# EAGLE board CT_schematic (EAGLE 7.6.0)

Size 100 x 80 mm. Coordinates in mm from the lower left corner, seen from the top.
Outline: 0,0 100,0 100,80 0,80 0,0
Copper layers (1*16): Top 0.035mm / dielectric 1.5mm / Bottom 0.035mm
Design rules "default": minimum track width 10mil, minimum drill 24mil, track to track 8mil, track to pad 8mil, pad to pad 8mil, via to via 8mil, smd to smd 8mil, copper to edge 40mil, drill to drill 8mil, minimum pad ring 10mil, minimum via ring 8mil, stop-mask expansion 4mil, vias tented up to drill 0mil, thermal gap 10mil

## Footprints (pad centres in the part's own frame; a part is rotated, then mirrored left to right if it is on the bottom)
C0603 = smd 0.8 x 0.8: 1 -0.762,0; 2 0.762,0
C0402 = smd 0.5 x 0.5: 1 -0.508,0; 2 0.508,0
C0805 = smd 1.2 x 1.3: 1 -1.016,0; 2 1.016,0
EXV-9B = smd 2.718 x 1.778: 1 -2.108,0; 2 2.108,0
C1206 = smd 1.3 x 1.6: 1 -1.524,0; 2 1.524,0
C1210 = smd 1.2 x 2.5: 1 -1.524,0; 2 1.524,0
EXV-9H = smd 3.505 x 1.676: 1 -2.857,0; 2 2.857,0
L0603 = smd 0.8 x 0.8: 1 -0.762,0; 2 0.762,0
L1210 = smd 1.2 x 2.5: 1 -1.524,0; 2 1.524,0
PJ-037B_PACKAGE = drill 3.7 square: 1 12,0 | drill 3.2 square: 2 6,0
R0603 = smd 0.8 x 0.8: 1 -0.762,0; 2 0.762,0
LQFP100 = smd 0.3 x 1.2: 1 -6,-7.75; 2 -5.5,-7.75; 3 -5,-7.75; 4 -4.5,-7.75; 5 -4,-7.75; 6 -3.5,-7.75; 7 -3,-7.75; 8 -2.5,-7.75; 9 -2,-7.75; 10 -1.5,-7.75; 11 -1,-7.75; 12 -0.5,-7.75; 13 0,-7.75; 14 0.5,-7.75; 15 1,-7.75; 16 1.5,-7.75; 17 2,-7.75; 18 2.5,-7.75; 19 3,-7.75; 20 3.5,-7.75; 21 4,-7.75; 22 4.5,-7.75; 23 5,-7.75; 24 5.5,-7.75; 25 6,-7.75; 51 6,7.75; 52 5.5,7.75; 53 5,7.75; 54 4.5,7.75; 55 4,7.75; 56 3.5,7.75; 57 3,7.75; 58 2.5,7.75; 59 2,7.75; 60 1.5,7.75; 61 1,7.75; 62 0.5,7.75; 63 0,7.75; 64 -0.5,7.75; 65 -1,7.75; 66 -1.5,7.75; 67 -2,7.75; 68 -2.5,7.75; 69 -3,7.75; 70 -3.5,7.75; 71 -4,7.75; 72 -4.5,7.75; 73 -5,7.75; 74 -5.5,7.75; 75 -6,7.75 | smd 1.2 x 0.3: 26 7.75,-6; 27 7.75,-5.5; 28 7.75,-5; 29 7.75,-4.5; 30 7.75,-4; 31 7.75,-3.5; 32 7.75,-3; 33 7.75,-2.5; 34 7.75,-2; 35 7.75,-1.5; 36 7.75,-1; 37 7.75,-0.5; 38 7.75,0; 39 7.75,0.5; 40 7.75,1; 41 7.75,1.5; 42 7.75,2; 43 7.75,2.5; 44 7.75,3; 45 7.75,3.5; 46 7.75,4; 47 7.75,4.5; 48 7.75,5; 49 7.75,5.5; 50 7.75,6; 76 -7.75,6; 77 -7.75,5.5; 78 -7.75,5; 79 -7.75,4.5; 80 -7.75,4; 81 -7.75,3.5; 82 -7.75,3; 83 -7.75,2.5; 84 -7.75,2; 85 -7.75,1.5; 86 -7.75,1; 87 -7.75,0.5; 88 -7.75,0; 89 -7.75,-0.5; 90 -7.75,-1; 91 -7.75,-1.5; 92 -7.75,-2; 93 -7.75,-2.5; 94 -7.75,-3; 95 -7.75,-3.5; 96 -7.75,-4; 97 -7.75,-4.5; 98 -7.75,-5; 99 -7.75,-5.5; 100 -7.75,-6
SOT-23-6 = smd 1.1 x 0.6: 1 -1.4,0.95; 2 -1.4,0; 3 -1.4,-0.95; 4 1.4,-0.95; 5 1.4,0; 6 1.4,0.95
SSOP-20 = smd 1.651 x 0.432: 1 -3.48,2.925; 2 -3.48,2.275; 3 -3.48,1.625; 4 -3.48,0.975; 5 -3.48,0.325; 6 -3.48,-0.325; 7 -3.48,-0.975; 8 -3.48,-1.625; 9 -3.48,-2.275; 10 -3.48,-2.925; 11 3.48,-2.925; 12 3.48,-2.275; 13 3.48,-1.625; 14 3.48,-0.975; 15 3.48,-0.325; 16 3.48,0.325; 17 3.48,0.975; 18 3.48,1.625; 19 3.48,2.275; 20 3.48,2.925
182-009-MALE = drill 1.194 pad 1.524 octagon: 1 -5.537,10.923; 2 -2.769,10.923; 3 0,10.923; 4 2.769,10.923; 5 5.537,10.923; 6 -4.153,8.08; 7 -1.384,8.08; 8 1.384,8.08; 9 4.153,8.08 | hole 3.048: -12.446,9.501; 12.446,9.501
SOIC-8 = smd 1.6 x 0.6: 1 -2.7,1.905 | smd 1.55 x 0.6: 2 -2.7,0.635; 3 -2.7,-0.635; 4 -2.7,-1.905; 5 2.7,-1.905; 6 2.7,-0.635; 7 2.7,0.635; 8 2.7,1.905
TSSOP20-I = smd 0.4 x 1.35: 1 -2.925,-2.875; 2 -2.275,-2.875; 3 -1.625,-2.875; 4 -0.975,-2.875; 5 -0.325,-2.875; 6 0.325,-2.875; 7 0.975,-2.875; 8 1.625,-2.875; 9 2.275,-2.875; 10 2.925,-2.875; 11 2.925,2.875; 12 2.275,2.875; 13 1.625,2.875; 14 0.975,2.875; 15 0.325,2.875; 16 -0.325,2.875; 17 -0.975,2.875; 18 -1.625,2.875; 19 -2.275,2.875; 20 -2.925,2.875
MICRO_USB_AB = smd 0.4 x 1.35: 1 1.3,0.26; 2 0.65,0.26; 3 0,0.26; 4 -0.65,0.26; 5 -1.3,0.26 | drill 0.6 pad 0.95 long: 6 4.175,-2.54; 7 -4.175,-2.54 | drill 0.7 pad 1.1 long: 8 -2.225,0.46; 9 2.225,0.46
SOT143B = smd 1 x 0.7: 1 -0.75,-1 | smd 0.6 x 0.7: 2 0.95,-1; 3 0.95,1; 4 -0.95,1
ABS07-32.768KHZ-7-T = smd 1.1 x 2.4: 1 -2.5,0; 2 0,0
ABLS-25.000MHZ-B2F-T = smd 5.6 x 2.8: 1 -3.81,0; 2 5.69,0
LP2954 = smd 1.6 x 0.6: 1 -2.475,1.905 | smd 1.55 x 0.6: 2 -2.475,0.635; 3 -2.475,-0.635; 4 -2.475,-1.905; 5 2.475,-1.905; 6 2.475,-0.635; 7 2.475,0.635; 8 2.475,1.905
WSON-8 = smd 0.3 x 0.6: 1 -0.75,0; 2 0.05,0; 3 0.85,0; 4 1.65,0; 5 1.65,3.8; 6 0.85,3.8; 7 0.05,3.8; 8 -0.75,3.8 | smd 3 x 2.6: PAD 0.45,1.9
SON-6 = smd 0.55 x 0.3: 1 -0.355,0.5 | smd 0.52 x 0.3: 2 -0.37,0; 3 -0.37,-0.5; 4 0.37,-0.5; 5 0.37,0; 6 0.37,0.5
SW_4-1437565-2 = smd 1.4 x 2.1: 1 -2.23,4.55; 2 -2.23,-4.55; 3 2.23,4.55; 4 2.23,-4.55
LGM67K-G1J2-24-Z = smd 0.8 x 1.4: A -2,0; C 0,0
NC7SZ125M5X = smd 1.3 x 0.7: 1 -1.3,0.95; 2 -1.3,0; 3 -1.3,-0.95; 4 1.3,-0.95; 5 1.3,0.95
DUMMY_PACKAGE_173 = drill 0.3: 1 0,-1; 2 1.5,-1

## Placement (x,y rotation side)
C1  1e-06  [C0603]  -45.72,82.55 0 top  (outside the outline)
C2  1e-07  [C0603]  -49.53,82.55 0 top  (outside the outline)
C3  1e-07  [C0603]  -53.34,82.55 0 top  (outside the outline)
C4  1e-07  [C0603]  -57.15,82.55 0 top  (outside the outline)
C5  1e-07  [C0603]  -60.96,82.55 0 top  (outside the outline)
C6  1e-07  [C0603]  -64.77,82.55 0 top  (outside the outline)
C7  1e-07  [C0603]  -68.58,82.55 0 top  (outside the outline)
C8  4.7e-06  [C0603]  -34.29,82.55 0 top  (outside the outline)
C9  2.2e-06  [C0603]  -38.1,82.55 0 top  (outside the outline)
C10  2.2e-06  [C0603]  -41.91,82.55 0 top  (outside the outline)
C11  1e-08  [C0603]  -72.39,82.55 0 top  (outside the outline)
C12  1e-06  [C0603]  -76.2,82.55 0 top  (outside the outline)
C13  1e-11  [C0402]  -45.72,87.63 0 top  (outside the outline)
C14  1e-11  [C0402]  -49.53,87.63 0 top  (outside the outline)
C15  1e-11  [C0402]  -53.34,87.63 0 top  (outside the outline)
C16  1e-11  [C0402]  -57.15,87.63 0 top  (outside the outline)
C17  1e-06  [C0603]  -80.01,82.55 0 top  (outside the outline)
C18  1e-06  [C0603]  -83.82,82.55 0 top  (outside the outline)
C19  1e-06  [C0603]  -87.63,82.55 0 top  (outside the outline)
C20  4.7e-06  [C0805]  -21.59,76.2 0 top  (outside the outline)
C21  1e-06  [C0603]  -15.24,87.63 0 top  (outside the outline)
C22  1e-06  [C0603]  -19.05,87.63 0 top  (outside the outline)
C23  1e-07  [C0402]  -60.96,87.63 0 top  (outside the outline)
C24  1e-07  [C0402]  -64.77,87.63 0 top  (outside the outline)
C25  1e-07  [C0402]  -68.58,87.63 0 top  (outside the outline)
C26  1e-07  [C0402]  -72.39,87.63 0 top  (outside the outline)
C27  1e-07  [C0402]  -76.2,87.63 0 top  (outside the outline)
C28  1e-07  [C0402]  -80.01,87.63 0 top  (outside the outline)
C29  1e-06  [EXV-9B]  -68.58,68.58 0 top  (outside the outline)
C30  2.2e-06  [EXV-9B]  -77.47,68.58 0 top  (outside the outline)
C31  1e-08  [C0402]  -83.82,87.63 0 top  (outside the outline)
C32  1e-05  [C1206]  -60.96,68.58 0 top  (outside the outline)
C33  1e-05  [C1210]  -48.26,69.85 0 top  (outside the outline)
C34  1e-07  [C0402]  -87.63,87.63 0 top  (outside the outline)
C35  0.0001  [EXV-9H]  -48.26,60.96 0 top  (outside the outline)
C36  0.0001  [EXV-9H]  -59.69,60.96 0 top  (outside the outline)
C37  1e-08  [C0402]  -15.24,92.71 0 top  (outside the outline)
F1  240.0  [L0603]  -22.86,87.63 0 top  (outside the outline)
I1  1.5e-05  [L1210]  -54.61,69.85 0 top  (outside the outline)
J1  PJ-037B  [PJ-037B_PACKAGE]  -87.63,29.21 0 top  (outside the outline)
R2  1000.0  [R0603]  -26.67,87.63 0 top  (outside the outline)
R4  4700.0  [R0603]  -30.48,87.63 0 top  (outside the outline)
R5  47000.0  [R0603]  -72.39,76.2 0 top  (outside the outline)
R6  10000.0  [R0603]  -77.47,76.2 0 top  (outside the outline)
R7  10000.0  [R0603]  -82.55,76.2 0 top  (outside the outline)
R8  10000.0  [R0603]  -87.63,76.2 0 top  (outside the outline)
R9  100000.0  [R0603]  -26.67,76.2 0 top  (outside the outline)
R10  100000.0  [R0603]  -31.75,76.2 0 top  (outside the outline)
R11  100000.0  [R0603]  -36.83,76.2 0 top  (outside the outline)
R12  120.0  [R0603]  -34.29,87.63 0 top  (outside the outline)
R13  100000.0  [R0603]  -41.91,76.2 0 top  (outside the outline)
R14  100000.0  [R0603]  -46.99,76.2 0 top  (outside the outline)
R15  47000.0  [R0603]  -15.24,82.55 0 top  (outside the outline)
R16  100000.0  [R0603]  -52.07,76.2 0 top  (outside the outline)
R17  100000.0  [R0603]  -57.15,76.2 0 top  (outside the outline)
R18  3900.0  [R0603]  -38.1,87.63 0 top  (outside the outline)
R19  1000.0  [R0603]  -41.91,87.63 0 top  (outside the outline)
R20  10000.0  [R0603]  -20.32,82.55 0 top  (outside the outline)
R21  10000.0  [R0603]  -25.4,82.55 0 top  (outside the outline)
R22  82000.0  [R0603]  -30.48,82.55 0 top  (outside the outline)
R23  300000.0  [R0603]  -62.23,76.2 0 top  (outside the outline)
R24  120000.0  [R0603]  -67.31,76.2 0 top  (outside the outline)
U1  STM32f207VGT6  [LQFP100]  -63.5,31.75 0 top  (outside the outline)
U2  MAX4995AAUT+T  [SOT-23-6]  -85.09,68.58 0 top  (outside the outline)
U3  MAX3218EAP+T  [SSOP-20]  -17.78,60.96 0 top  (outside the outline)
U4  182-009-113R531  [182-009-MALE]  -36.83,6.35 0 top  (outside the outline)
U5  MCP2562-E/SN  [SOIC-8]  -86.36,49.53 0 top  (outside the outline)
U6  182-009-113R531  [182-009-MALE]  -76.2,6.35 0 top  (outside the outline)
U7  SP3203ECY-L/TR  [TSSOP20-I]  -55.88,49.53 0 top  (outside the outline)
U8  182-009-113R531  [182-009-MALE]  -36.83,27.94 0 top  (outside the outline)
U9  47590-0001  [MICRO_USB_AB]  -20.32,52.07 0 top  (outside the outline)
U10  prtr5v0u2ax  [SOT143B]  -27.94,92.71 0 top  (outside the outline)
U11  ABS07-32.768KHZ-7-T  [ABS07-32.768KHZ-7-T]  -27.94,69.85 0 top  (outside the outline)
U12  ABLS-25.000MHZ-B2F-T  [ABLS-25.000MHZ-B2F-T]  -78.74,60.96 0 top  (outside the outline)
U13  LP2954AIMX/NOPB  [LP2954]  -72.39,49.53 0 top  (outside the outline)
U14  LP3878SDX-ADJ/NOPB  [WSON-8]  -40.64,59.69 0 top  (outside the outline)
U15  TPS3895ADRYR  [SON-6]  -35.56,91.44 0 top  (outside the outline)
U16  4-1437565-2  [SW_4-1437565-2]  -40.64,49.53 0 top  (outside the outline)
U17  Q65110A2395  [LGM67K-G1J2-24-Z]  -36.83,69.85 0 top  (outside the outline)
U18  nc7sz125m5x  [NC7SZ125M5X]  -15.24,76.2 0 top  (outside the outline)
U19  Dummy  [DUMMY_PACKAGE_173]  -33.02,92.71 0 top  (outside the outline)

## Library data of the parts
C1-C37 F1 I1 J1 R2 R4-R24 U1-U19 = circuit_tree

## Nets
CLK_CRYSTAL_U1_8: C13.1 U1.8 U11.1
CLK_CRYSTAL_U1_9: C14.1 U1.9 U11.2
CLK_CRYSTAL_U1_12: C15.1 U1.12 U12.1
CLK_CRYSTAL_U1_13: C16.1 U1.13 U12.2
GND: C1.2 C2.2 C3.2 C4.2 C5.2 C6.2 C7.2 C8.2 C9.2 C10.2 C11.2 C12.2 C13.2 C14.2 C15.2 C16.2 C17.2 C18.2 C19.2 C21.2 C22.2 C23.2 C24.2 C27.2 C28.2 C29.2 C30.2 C31.2 C32.2 C33.2 C34.2 C35.2 C36.2 C37.2 J1.2 R2.2 R5.2 R6.2 R8.2 R16.2 R19.2 R22.2 R24.2 U1.10 U1.20 U1.27 U1.74 U2.2 U3.5 U3.17 U3.20 U4.5 U5.2 U5.8 U6.5 U7.18 U8.5 U9.5 U9.6 U9.7 U9.8 U9.9 U10.1 U13.4 U14.3 U14.PAD U15.2 U17.C U18.1 U18.3 U19.1
NET_U1_14: R4.1 U1.14 U18.4
NET_U1_22: C11.1 C12.1 F1.1 U1.21 U1.22
NET_U1_49: C9.1 U1.49
NET_U1_73: C10.1 U1.73
NET_U1_94: R6.1 U1.94
NET_U1_97: U17.A
NET_U1_98: U16.3 U16.4
NET_U2_3: R5.1 U2.3
NET_U3_1: I1.1 U3.1
NET_U3_2: R9.1 U3.2
NET_U3_3: R10.1 U3.3
NET_U3_4: R11.1 U3.4
NET_U3_15: C19.1 U3.15
NET_U3_16: C20.2 U3.16
NET_U3_18: C20.1 U3.18
NET_U3_19: C18.1 U3.19
NET_U4_2: U3.12 U4.2
NET_U4_3: U3.14 U4.3
NET_U4_7: U3.11 U4.7
NET_U4_8: U3.13 U4.8
NET_U5_6: R12.2 U5.6
NET_U6_2: R12.2 U5.6 U6.2
NET_U6_3: R12.1 U5.7 U6.3
NET_U7_1: C25.1 U7.1
NET_U7_2: C27.1 U7.2
NET_U7_3: C25.2 U7.3
NET_U7_4: C26.1 U7.4
NET_U7_5: C26.2 U7.5
NET_U7_6: C28.1 U7.6
NET_U7_20: U7.20
NET_U8_2: U7.14 U8.2
NET_U8_3: U7.17 U8.3
NET_U8_7: U7.13 U8.7
NET_U8_8: U7.16 U8.8
NET_U13_3: R14.1 U13.3
NET_U13_5: R13.1 U13.5
NET_U13_7: R15.2 R16.1 U13.7
NET_U14_1: C31.1 U14.1
NET_U14_6: R18.2 R19.1 U14.6
NET_U14_8: R17.1 U14.8
NET_U15_1: R21.1 R22.1 U15.1
NET_U15_3: R23.2 R24.1 U15.3
NET_U15_4: R20.1 U15.4 U18.2
NET_U16_1: R2.1 U16.1 U16.2
PROC_CAN1_RX: U1.81 U5.4
PROC_CAN1_TX: U1.82 U5.1
PROC_DAC_OUT2: U1.30 U19.2
PROC_GPIO_TO_U1_USB_FAULT: R7.1 U1.2 U2.6
PROC_GPIO_TO_U1_VBUS_EN: R8.1 U1.1 U2.4
PROC_UART4_RX: U1.24 U7.11
PROC_UART4_TX: U1.23 U7.7
PROC_UART5_RX: U1.83 U3.9
PROC_UART5_TX: U1.80 U3.7
PROC_USB_OTG_FS_DM: U1.70 U9.2 U10.3
PROC_USB_OTG_FS_DP: U1.71 U9.3 U10.2
PROC_USB_OTG_FS_ID: U1.69 U9.4
PROC_USB_OTG_FS_VBUS: U1.68 U2.1 U9.1 U10.4
VCC_S1_9V3: C29.1 C32.1 C35.1 C36.1 J1.1 R14.2 R17.2 U13.8 U14.4
VCC_TIER1_1V8: C1.1 C2.1 C3.1 C4.1 C5.1 C6.1 C7.1 C8.1 C17.1 C22.1 C24.1 C30.1 C34.1 C37.1 F1.2 I1.2 R4.2 R7.2 R9.2 R10.2 R11.2 R13.2 R15.1 R20.2 R21.2 R23.1 U1.6 U1.11 U1.19 U1.28 U1.50 U1.75 U1.100 U3.6 U5.5 U7.12 U13.1 U15.6 U18.5
VCC_TIER1_5V0: C21.1 C23.1 C33.1 R18.1 U2.5 U5.3 U7.19 U14.5

## Tracks (layer width: path | path; a pad name or v marks a point on that pad's centre or on a via)
CLK_CRYSTAL_U1_8  (2 unrouted)
CLK_CRYSTAL_U1_9  (2 unrouted)
CLK_CRYSTAL_U1_12  (2 unrouted)
CLK_CRYSTAL_U1_13  (2 unrouted)
GND  (70 unrouted)
NET_U1_14  (2 unrouted)
NET_U1_22  (4 unrouted)
NET_U1_49  (1 unrouted)
NET_U1_73  (1 unrouted)
NET_U1_94  (1 unrouted)
NET_U1_98  (1 unrouted)
NET_U2_3  (1 unrouted)
NET_U3_1  (1 unrouted)
NET_U3_2  (1 unrouted)
NET_U3_3  (1 unrouted)
NET_U3_4  (1 unrouted)
NET_U3_15  (1 unrouted)
NET_U3_16  (1 unrouted)
NET_U3_18  (1 unrouted)
NET_U3_19  (1 unrouted)
NET_U4_2  (1 unrouted)
NET_U4_3  (1 unrouted)
NET_U4_7  (1 unrouted)
NET_U4_8  (1 unrouted)
NET_U5_6  (1 unrouted)
NET_U6_2  (2 unrouted)
NET_U6_3  (2 unrouted)
NET_U7_1  (1 unrouted)
NET_U7_2  (1 unrouted)
NET_U7_3  (1 unrouted)
NET_U7_4  (1 unrouted)
NET_U7_5  (1 unrouted)
NET_U7_6  (1 unrouted)
NET_U8_2  (1 unrouted)
NET_U8_3  (1 unrouted)
NET_U8_7  (1 unrouted)
NET_U8_8  (1 unrouted)
NET_U13_3  (1 unrouted)
NET_U13_5  (1 unrouted)
NET_U13_7  (2 unrouted)
NET_U14_1  (1 unrouted)
NET_U14_6  (2 unrouted)
NET_U14_8  (1 unrouted)
NET_U15_1  (2 unrouted)
NET_U15_3  (2 unrouted)
NET_U15_4  (2 unrouted)
NET_U16_1  (2 unrouted)
PROC_CAN1_RX  (1 unrouted)
PROC_CAN1_TX  (1 unrouted)
PROC_DAC_OUT2  (1 unrouted)
PROC_GPIO_TO_U1_USB_FAULT  (2 unrouted)
PROC_GPIO_TO_U1_VBUS_EN  (2 unrouted)
PROC_UART4_RX  (1 unrouted)
PROC_UART4_TX  (1 unrouted)
PROC_UART5_RX  (1 unrouted)
PROC_UART5_TX  (1 unrouted)
PROC_USB_OTG_FS_DM  (2 unrouted)
PROC_USB_OTG_FS_DP  (2 unrouted)
PROC_USB_OTG_FS_ID  (1 unrouted)
PROC_USB_OTG_FS_VBUS  (3 unrouted)
VCC_S1_9V3  (8 unrouted)
VCC_TIER1_1V8  (38 unrouted)
VCC_TIER1_5V0  (7 unrouted)